# Altium PCB HCF4051.PcbDoc
Units mil, origin at the board's own origin, x right, y up, seen from the top; angles counter-clockwise.
Board outline 6000 x 4000 mil, 2 copper layers (Top Layer, Bottom Layer); 9 components, 18 nets, 54 pads, 0 vias.
Unrouted connection lines stored in the file: 6.
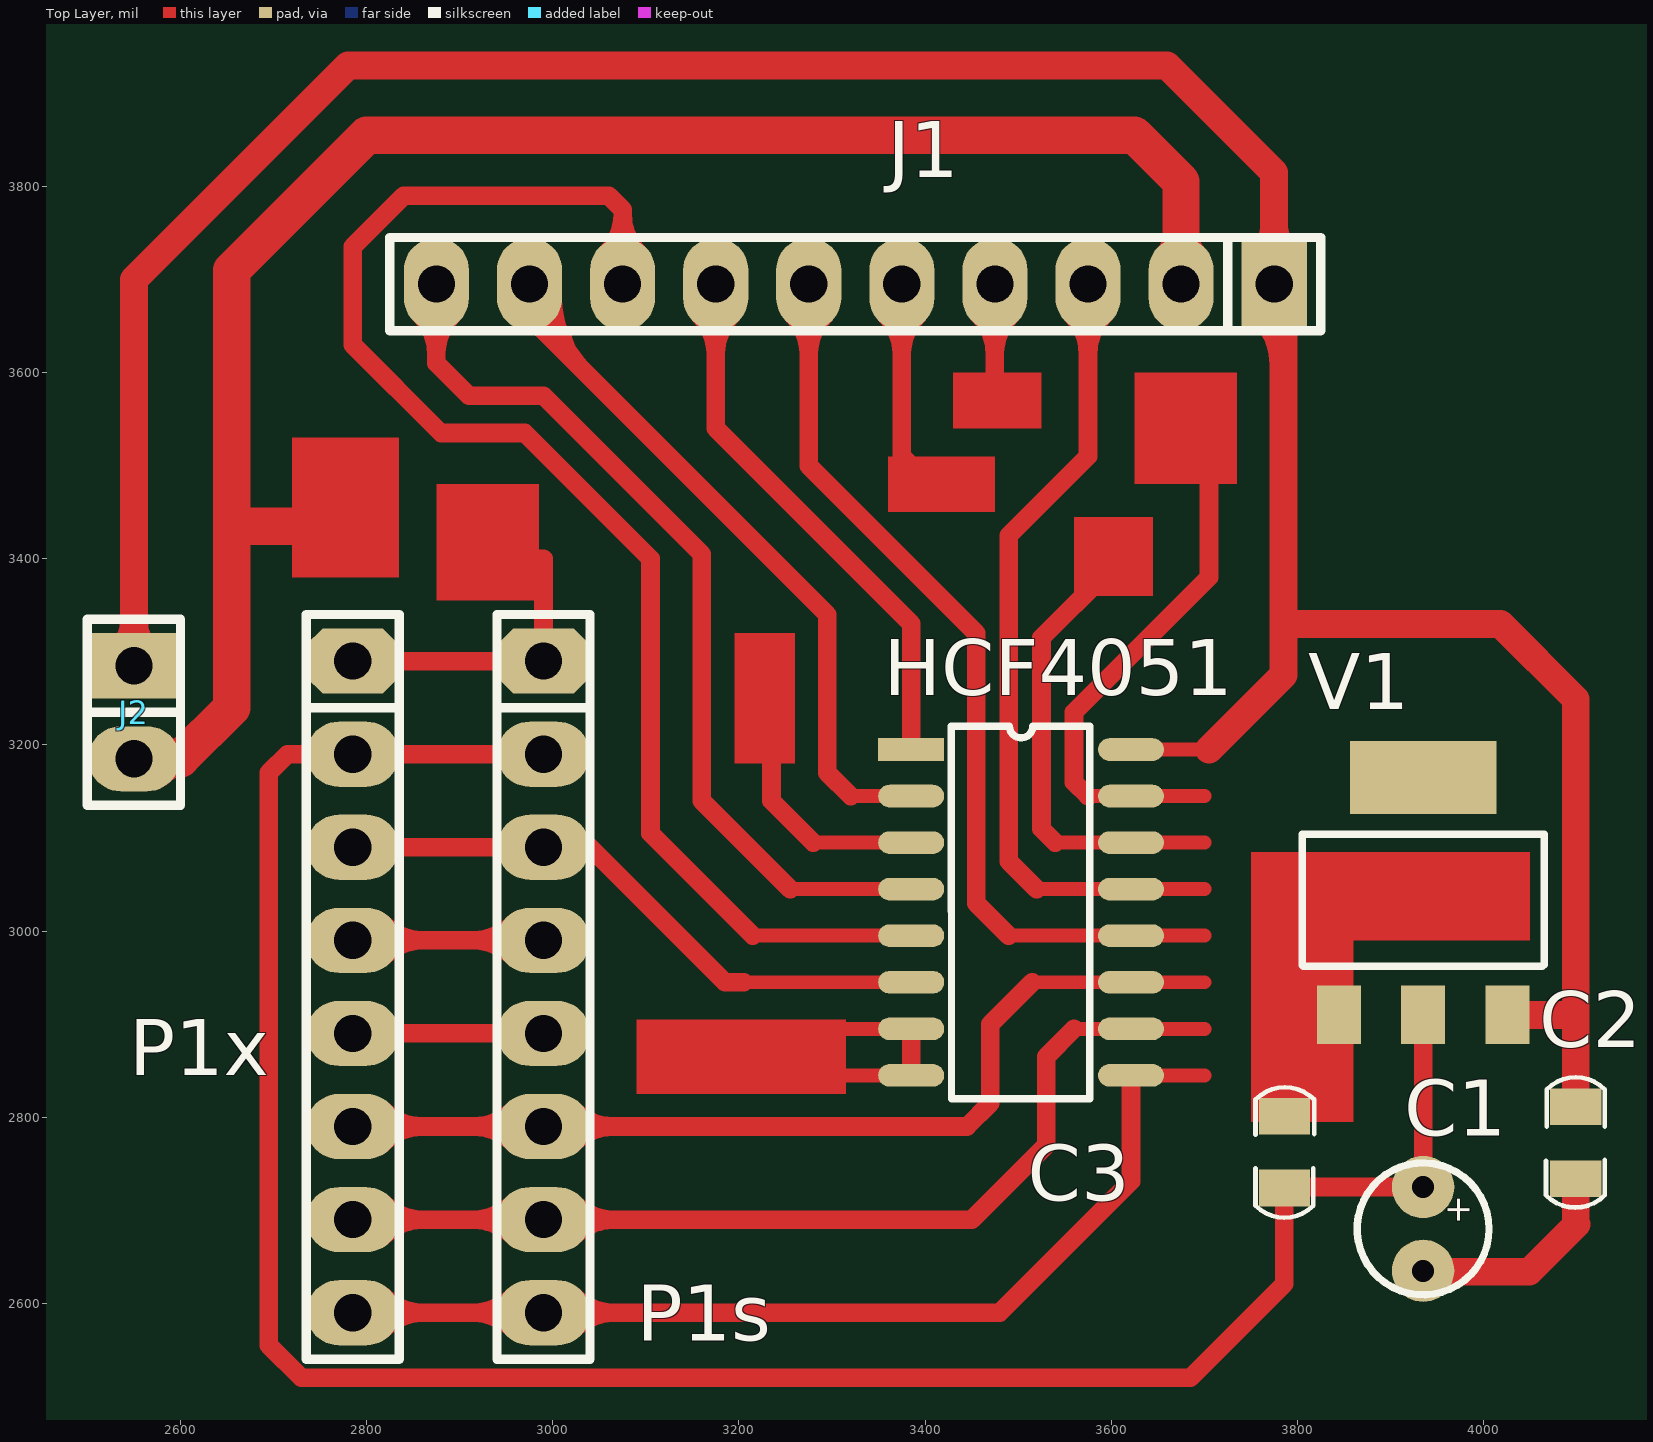
[diagram p0: Top Layer view]
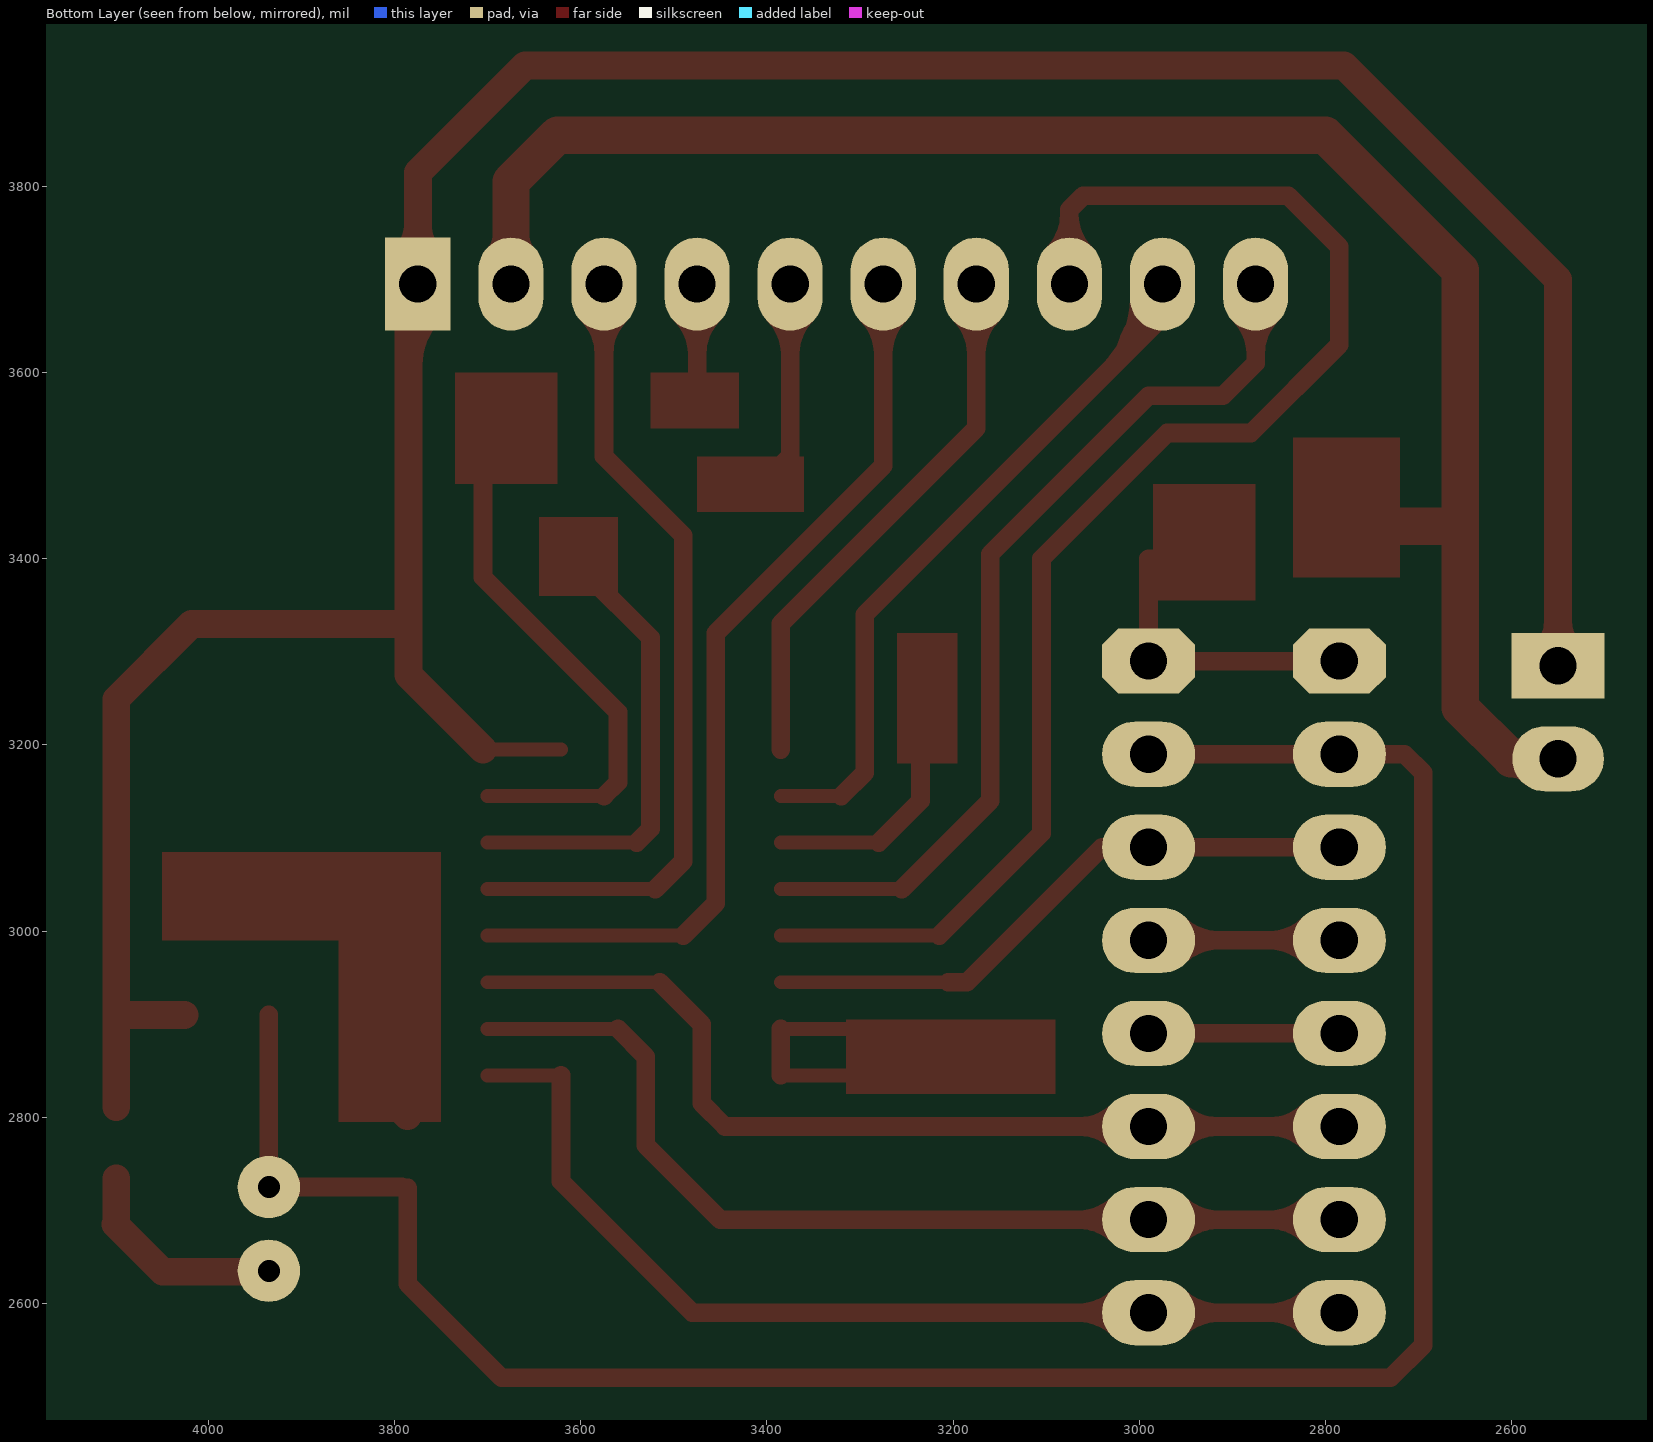
[diagram p1: Bottom Layer view, seen from below]

## Layer stack, top to bottom
Top Layer: signal copper 1.4
Dielectric: dielectric 12.6, FR-4, Dk 4.8
Bottom Layer: signal copper 1.4

## Board outline
1000,1000 7000,1000 7000,5000 1000,5000

## Design rules (kind name [scope] priority, off if disabled: settings)
Clearance [All] p1: gap=10
ComponentClearance [All] p1 off: gap=10 collisioncheckmode=3 verticalgap=10 showdistances=FALSE
PolygonConnect [All] p1: connectstyle=Relief reliefconductorwidth=10 reliefentries=4 polygonreliefangle="90 Angle" airgapwidth=10
RoutingVias [All] p1: holewidth=28 width=50 viastyle="Through Hole" minholewidth=28 minwidth=50 maxholewidth=28 maxwidth=50
SilkscreenOverComponentPads [All] p1: minsilkscreentomaskgap=10
SolderMaskExpansion [All] p1: expansion=4
Width [All] p1: maxlimit=100 minlimit=10 preferedwidth=10
26 further rules are at their usual default settings.

## Components (designator, comment, footprint, x,y, rotation, side; value= is the part's Value field where it differs from the comment)
C1 "220uF" CAO1 3935,2680 r270 top
C2 "104" C0805 4100,2735 r90 top
C3 "104" C0805 3785,2800 r270 top
HCF4051 "4051" SOP-16 3385,3195 r0 top
J1 "CON10" sip-10 3775,3695 r180 top
J2 "CON2" sip-2 2550,3285 r270 top
P1s "CON8" sip-8 2990,3290 r270 top
P1x "CON8" sip-8 2785,3290 r270 top
V1 "TLV1117" SOT-223 3935,2910 r0 top

## Footprints (in the part's own frame and the unit in brackets; to place one, negate y for a bottom-side part, rotate by r counter-clockwise, add the part's x,y. Pads: shape width x height; smd on the part's side, far side on the other; paste and mask are expansions set on the pad)
C0805 [mm]
  rect 1x1.4 smd: 1(-0.025,0.025) 2(1.933,0.025)
  silkscreen extent -0.81,-0.76 2.74,0.84
CAO1 [mm]
  round 1.7 hole 0.6: 1(-1.143,0) 2(1.143,0)
  silkscreen extent -1.8,-1.8 1.8,1.8
sip-2 [mil]
  rect 70x100 hole 40: 1(0,0)
  oval 70x98.42 hole 40: 2(100,0)
  silkscreen extent -50,-50 150,50
sip-8 [mil]
  oct 70x100 hole 40: 1(0,0)
  oval 70x100 hole 40: 2(100,0) 3(200,0) 4(300,0) 5(400,0) 6(500,0) 7(600,0) 8(700,0)
  silkscreen extent -50,-50 750,50
sip-10 [mil]
  rect 70x100 hole 40: 1(0,0)
  oval 70x100 hole 40: 2(100,0) 3(200,0) 4(300,0) 5(400,0) 6(500,0) 7(600,0) 8(700,0) 9(800,0) 10(900,0)
  silkscreen extent -50,-50 950,50
SOP-16 [mm]
  rect 1.8x0.62 smd: 1(0,0)
  oval 1.8x0.62 smd: 2(0,-1.27) 3(0,-2.54) 4(0,-3.81) 5(0,-5.08) 6(0,-6.35) 7(0,-7.62) 8(0,-8.89) 9(6,-8.89) 10(6,-7.62) 11(6,-6.35) 12(6,-5.08) 13(6,-3.81) 14(6,-2.54) 15(6,-1.27) 16(6,0)
  silkscreen extent 1.09,-9.53 4.88,0.64
SOT-223 [mm]
  rect 1.2x1.6 smd: 1(-2.3,0) 2(0,0) 3(2.3,0)
  rect 4x2 smd: 4(0,6.477)
  silkscreen extent -3.3,1.32 3.3,4.93

## Part data
C1 C2 C3: library part C
HCF4051: library part 405
J1 J2 P1s P1x: "Connec"
V1: library part TL

## Nets (pads, with @x,y where several pads share a name; then routed paths per layer and width w, separated by ;. In a path a pad name is that pad's centre, name@x,y a point inside that pad or via, vN(x,y) a via of type N, cw(c..) or ccw(c..) an arc to the next point about the centre after c; other vN are vias at no path point)
3.3V: C1.1 C3.2 P1s.2 P1x.2 V1.2 | length 2496.4
  Top Layer w20: P1s.2 P1x.2 2715,3190 2695,3170 2695,2555 2730,2520 3685,2520 3786,2621 C3.2 ; C3.2@3792.09,2725 C1.1 V1.2
ADC0: HCF4051.3 P1s.1 P1x.1 | length 593.6
  Top Layer w15: 3280,3095 HCF4051.3
  Top Layer w20: P1x.1 P1s.1 2990,3400 2955,3400 ; 3235,3215 3235,3140 3280,3095
D: HCF4051.11 P1s.6 P1x.6 | length 1882.2
  Top Layer w15: 3515,2945 HCF4051.11 3700,2945
  Top Layer w20: P1x.6 P1s.6 3445,2790 3470,2815 3470,2900 3515,2945 ; P1x.6@2817.68,2772.32 cw(c2860.36,2729.64) 2860.36,2790 ; P1x.6@2817.68,2772.32 cw(c2860.36,2729.64) 2860.36,2790 ; P1x.6@2817.68,2772.32 cw(c2860.36,2729.64) 2860.36,2790 ; P1x.6@2817.68,2807.68 ccw(c2860.36,2850.36) 2860.36,2790 ; P1x.6@2817.68,2807.68 ccw(c2860.36,2850.36) 2860.36,2790 ; P1x.6@2817.68,2807.68 ccw(c2860.36,2850.36) 2860.36,2790 ; 2914.64,2790 ccw(c2914.64,2850.36) P1s.6@2957.32,2807.68 ; 2914.64,2790 cw(c2914.64,2729.64) P1s.6@2957.32,2772.32 ; 2914.64,2790 ccw(c2914.64,2850.36) P1s.6@2957.32,2807.68 ; 2914.64,2790 cw(c2914.64,2729.64) P1s.6@2957.32,2772.32 ; 2914.64,2790 ccw(c2914.64,2850.36) P1s.6@2957.32,2807.68 ; 2914.64,2790 cw(c2914.64,2729.64) P1s.6@2957.32,2772.32 ; P1s.6@3022.68,2772.32 cw(c3065.36,2729.64) 3065.36,2790 ; P1s.6@3022.68,2772.32 cw(c3065.36,2729.64) 3065.36,2790 ; P1s.6@3022.68,2772.32 cw(c3065.36,2729.64) 3065.36,2790 ; P1s.6@3022.68,2807.68 ccw(c3065.36,2850.36) 3065.36,2790 ; P1s.6@3022.68,2807.68 ccw(c3065.36,2850.36) 3065.36,2790 ; P1s.6@3022.68,2807.68 ccw(c3065.36,2850.36) 3065.36,2790
E: HCF4051.10 P1s.7 P1x.7 | length 1908.8
  Top Layer w15: 3560,2895 HCF4051.10 3700,2895
  Top Layer w20: P1x.7 P1s.7 3450,2690 3530,2770 3530,2865 3560,2895 ; P1x.7@2817.68,2672.32 cw(c2860.36,2629.64) 2860.36,2690 ; P1x.7@2817.68,2672.32 cw(c2860.36,2629.64) 2860.36,2690 ; P1x.7@2817.68,2672.32 cw(c2860.36,2629.64) 2860.36,2690 ; P1x.7@2817.68,2707.68 ccw(c2860.36,2750.36) 2860.36,2690 ; P1x.7@2817.68,2707.68 ccw(c2860.36,2750.36) 2860.36,2690 ; P1x.7@2817.68,2707.68 ccw(c2860.36,2750.36) 2860.36,2690 ; 2914.64,2690 ccw(c2914.64,2750.36) P1s.7@2957.32,2707.68 ; 2914.64,2690 cw(c2914.64,2629.64) P1s.7@2957.32,2672.32 ; 2914.64,2690 ccw(c2914.64,2750.36) P1s.7@2957.32,2707.68 ; 2914.64,2690 cw(c2914.64,2629.64) P1s.7@2957.32,2672.32 ; 2914.64,2690 ccw(c2914.64,2750.36) P1s.7@2957.32,2707.68 ; 2914.64,2690 cw(c2914.64,2629.64) P1s.7@2957.32,2672.32 ; P1s.7@3022.68,2672.32 cw(c3065.36,2629.64) 3065.36,2690 ; P1s.7@3022.68,2672.32 cw(c3065.36,2629.64) 3065.36,2690 ; P1s.7@3022.68,2672.32 cw(c3065.36,2629.64) 3065.36,2690 ; P1s.7@3022.68,2707.68 ccw(c3065.36,2750.36) 3065.36,2690 ; P1s.7@3022.68,2707.68 ccw(c3065.36,2750.36) 3065.36,2690 ; P1s.7@3022.68,2707.68 ccw(c3065.36,2750.36) 3065.36,2690
F: HCF4051.9 P1s.8 P1x.8 | length 1940.5
  Top Layer w15: HCF4051.9 3700,2845
  Top Layer w20: P1x.8 P1s.8 3480,2590 3621.22,2731.22 HCF4051.9 ; P1x.8@2817.68,2572.32 cw(c2860.36,2529.64) 2860.36,2590 ; P1x.8@2817.68,2572.32 cw(c2860.36,2529.64) 2860.36,2590 ; P1x.8@2817.68,2572.32 cw(c2860.36,2529.64) 2860.36,2590 ; P1x.8@2817.68,2607.68 ccw(c2860.36,2650.36) 2860.36,2590 ; P1x.8@2817.68,2607.68 ccw(c2860.36,2650.36) 2860.36,2590 ; P1x.8@2817.68,2607.68 ccw(c2860.36,2650.36) 2860.36,2590 ; 2914.64,2590 ccw(c2914.64,2650.36) P1s.8@2957.32,2607.68 ; 2914.64,2590 cw(c2914.64,2529.64) P1s.8@2957.32,2572.32 ; 2914.64,2590 ccw(c2914.64,2650.36) P1s.8@2957.32,2607.68 ; 2914.64,2590 cw(c2914.64,2529.64) P1s.8@2957.32,2572.32 ; 2914.64,2590 ccw(c2914.64,2650.36) P1s.8@2957.32,2607.68 ; 2914.64,2590 cw(c2914.64,2529.64) P1s.8@2957.32,2572.32 ; P1s.8@3022.68,2572.32 cw(c3065.36,2529.64) 3065.36,2590 ; P1s.8@3022.68,2572.32 cw(c3065.36,2529.64) 3065.36,2590 ; P1s.8@3022.68,2572.32 cw(c3065.36,2529.64) 3065.36,2590 ; P1s.8@3022.68,2607.68 ccw(c3065.36,2650.36) 3065.36,2590 ; P1s.8@3022.68,2607.68 ccw(c3065.36,2650.36) 3065.36,2590 ; P1s.8@3022.68,2607.68 ccw(c3065.36,2650.36) 3065.36,2590
GND: C1.2 C2.1 C3.1 HCF4051.7 HCF4051.8 J1.2 J2.2 V1.1 | length 2671.5
  Top Layer w15: 3285,2895 HCF4051.7 ; 3290,2845 HCF4051.8
  Top Layer w20: HCF4051.8 HCF4051.7
  Top Layer w30: C3.1 3844.45,2859.45 V1.1 ; C1.2@3936,2634 4049,2634 4100,2685 4099,2686 C2.1
  Top Layer w40: J2.2 2600,3185 2655,3240 2655,3435 ; J2.2@2574.82,3174.39 cw(c2600.43,3148.79) 2600.43,3185 cw(c2600.43,3221.21) J2.2@2574.82,3195.61 ; 2790,3435 2655,3435 ; J1.2@3664.39,3720.61 ccw(c3638.79,3746.21) 3675,3746.21 ccw(c3711.21,3746.21) J1.2@3685.61,3720.61 ; J1.2 3675,3805 3625,3855 2800,3855 2655,3710 2655,3435 ; C1.2 C1.2@3936,2634
INH: HCF4051.6 P1s.3 P1x.3 | length 660.1
  Top Layer w15: 3205,2945 HCF4051.6
  Top Layer w20: P1x.3 P1s.3 3040,3090 3185,2945 3205,2945
NetP1s_5: P1s.5 P1x.5 | length 205
  Top Layer w20: P1x.5 P1s.5
PWM: P1s.4 P1x.4 | length 773.8
  Top Layer w20: P1x.4 P1s.4 ; P1x.4@2817.68,2972.32 cw(c2860.36,2929.64) 2860.36,2990 ; P1x.4@2817.68,2972.32 cw(c2860.36,2929.64) 2860.36,2990 ; P1x.4@2817.68,2972.32 cw(c2860.36,2929.64) 2860.36,2990 ; P1x.4@2817.68,3007.68 ccw(c2860.36,3050.36) 2860.36,2990 ; P1x.4@2817.68,3007.68 ccw(c2860.36,3050.36) 2860.36,2990 ; P1x.4@2817.68,3007.68 ccw(c2860.36,3050.36) 2860.36,2990 ; 2914.64,2990 ccw(c2914.64,3050.36) P1s.4@2957.32,3007.68 ; 2914.64,2990 cw(c2914.64,2929.64) P1s.4@2957.32,2972.32 ; 2914.64,2990 ccw(c2914.64,3050.36) P1s.4@2957.32,3007.68 ; 2914.64,2990 cw(c2914.64,2929.64) P1s.4@2957.32,2972.32 ; 2914.64,2990 ccw(c2914.64,3050.36) P1s.4@2957.32,3007.68 ; 2914.64,2990 cw(c2914.64,2929.64) P1s.4@2957.32,2972.32
VCC: C2.2 HCF4051.16 J1.1 J2.1 V1.3 | length 3599.3
  Top Layer w15: HCF4051.16 3705,3195
  Top Layer w30: J2.1@2535.86,3299.14 ccw(c2501.72,3333.28) 2550,3333.28 ccw(c2598.28,3333.28) J2.1@2564.14,3299.14 ; J2.1 2550,3700 2780,3930 3660,3930 3775,3815 J1.1 3785,3685 3785,3330 ; 3705,3195 3785,3275 3785,3330 ; J1.1@3760.86,3665.86 cw(c3702.57,3607.57) 3785,3607.57 ; J1.1@3760.86,3724.14 ccw(c3726.72,3758.28) 3775,3758.28 ccw(c3823.28,3758.28) J1.1@3789.14,3724.14 ; V1.3 4099,2910 ; C2.2 4099,2910 ; 3785,3330 4018,3330 4099,3249 4099,2910
X1: HCF4051.13 J1.3 | length 1162.1
  Top Layer w15: 3520,3045 HCF4051.13 3700,3045
  Top Layer w20: 3520,3045 3490,3075 3490,3425 3575,3510 J1.3 ; J1.3@3557.32,3662.32 cw(c3514.64,3619.64) 3575,3619.64 ; J1.3@3557.32,3662.32 cw(c3514.64,3619.64) 3575,3619.64 ; J1.3@3557.32,3662.32 cw(c3514.64,3619.64) 3575,3619.64 ; 3575,3619.64 cw(c3635.36,3619.64) J1.3@3592.68,3662.32 ; 3575,3619.64 cw(c3635.36,3619.64) J1.3@3592.68,3662.32 ; 3575,3619.64 cw(c3635.36,3619.64) J1.3@3592.68,3662.32
X2: HCF4051.14 J1.4 | length 924.6
  Top Layer w15: 3540,3095 HCF4051.14 3700,3095
  Top Layer w20: 3475,3565 J1.4 ; 3540,3095 3525,3110 3525,3315 3595,3385 3595,3410 ; J1.4@3457.32,3662.32 cw(c3414.64,3619.64) 3475,3619.64 ; J1.4@3457.32,3662.32 cw(c3414.64,3619.64) 3475,3619.64 ; J1.4@3457.32,3662.32 cw(c3414.64,3619.64) 3475,3619.64 ; 3475,3619.64 cw(c3535.36,3619.64) J1.4@3492.68,3662.32 ; 3475,3619.64 cw(c3535.36,3619.64) J1.4@3492.68,3662.32 ; 3475,3619.64 cw(c3535.36,3619.64) J1.4@3492.68,3662.32
X3: HCF4051.15 J1.5 | length 1146.8
  Top Layer w15: 3575,3145 HCF4051.15 3700,3145
  Top Layer w20: J1.5 3375,3510 3415,3470 ; 3575,3145 3560,3160 3560,3235 3705,3380 3705,3525 3670,3560 ; J1.5@3357.32,3662.32 cw(c3314.64,3619.64) 3375,3619.64 ; J1.5@3357.32,3662.32 cw(c3314.64,3619.64) 3375,3619.64 ; J1.5@3357.32,3662.32 cw(c3314.64,3619.64) 3375,3619.64 ; 3375,3619.64 cw(c3435.36,3619.64) J1.5@3392.68,3662.32 ; 3375,3619.64 cw(c3435.36,3619.64) J1.5@3392.68,3662.32 ; 3375,3619.64 cw(c3435.36,3619.64) J1.5@3392.68,3662.32
X4: HCF4051.12 J1.6 | length 1283.5
  Top Layer w15: 3490,2995 HCF4051.12 3700,2995
  Top Layer w20: J1.6 3275,3500 3455,3320 3455,3030 3490,2995 ; J1.6@3257.32,3662.32 cw(c3214.64,3619.64) 3275,3619.64 ; J1.6@3257.32,3662.32 cw(c3214.64,3619.64) 3275,3619.64 ; J1.6@3257.32,3662.32 cw(c3214.64,3619.64) 3275,3619.64 ; 3275,3619.64 cw(c3335.36,3619.64) J1.6@3292.68,3662.32 ; 3275,3619.64 cw(c3335.36,3619.64) J1.6@3292.68,3662.32 ; 3275,3619.64 cw(c3335.36,3619.64) J1.6@3292.68,3662.32
X5: HCF4051.1 J1.7 | length 871.4
  Top Layer w20: J1.7 3175,3540 3385,3330 HCF4051.1 ; J1.7@3157.32,3662.32 cw(c3114.64,3619.64) 3175,3619.64 ; J1.7@3157.32,3662.32 cw(c3114.64,3619.64) 3175,3619.64 ; J1.7@3157.32,3662.32 cw(c3114.64,3619.64) 3175,3619.64 ; 3175,3619.64 cw(c3235.36,3619.64) J1.7@3192.68,3662.32 ; 3175,3619.64 cw(c3235.36,3619.64) J1.7@3192.68,3662.32 ; 3175,3619.64 cw(c3235.36,3619.64) J1.7@3192.68,3662.32
X6: HCF4051.5 J1.8 | length 1824.2
  Top Layer w15: 3215,2995 HCF4051.5
  Top Layer w20: J1.8 3075,3775 3060,3790 2840,3790 2785,3735 2785,3630 2880,3535 2970,3535 3105,3400 3105,3105 3215,2995 ; J1.8@3057.32,3727.68 ccw(c3014.64,3770.36) 3075,3770.36 ; J1.8@3057.32,3727.68 ccw(c3014.64,3770.36) 3075,3770.36 ; J1.8@3057.32,3727.68 ccw(c3014.64,3770.36) 3075,3770.36 ; 3075,3770.36 ccw(c3135.36,3770.36) J1.8@3092.68,3727.68 ; 3075,3770.36 ccw(c3135.36,3770.36) J1.8@3092.68,3727.68 ; 3075,3770.36 ccw(c3135.36,3770.36) J1.8@3092.68,3727.68
X7: HCF4051.2 J1.9 | length 1403.2
  Top Layer w15: 3320,3145 HCF4051.2
  Top Layer w20: J1.9 2975,3660 3295,3340 3295,3170 3320,3145 ; J1.9@2980.39,3655.59 cw(c2986.27,3628.89) 3003.72,3649.94 cw(c3015.51,3664.18) J1.9@2998.29,3670.91 ; J1.9@2972.92,3675.46 cw(c2941.45,3606.83) 3014.37,3626.37 ; J1.9@2972.92,3675.46 cw(c2941.45,3606.83) 3014.37,3626.37 ; J1.9@2972.92,3675.46 cw(c2941.45,3606.83) 3014.37,3626.37 ; J1.9@2980,3680 ccw(c3040.36,3680) 2997.68,3637.32 ; J1.9@2980,3680 ccw(c3040.36,3680) 2997.68,3637.32 ; J1.9@2980,3680 ccw(c3040.36,3680) 2997.68,3637.32 ; J1.9@3000,3680 ccw(c3108.64,3680) 3031.82,3603.18 ; J1.9@3000,3680 ccw(c3108.64,3680) 3031.82,3603.18 ; J1.9@3000,3680 ccw(c3108.64,3680) 3031.82,3603.18
X8: HCF4051.4 J1.10 | length 1268.7
  Top Layer w15: 3255,3045 HCF4051.4
  Top Layer w20: J1.10 2875,3610 2910,3575 2990,3575 3160,3405 3160,3140 3255,3045 ; J1.10@2857.32,3662.32 cw(c2814.64,3619.64) 2875,3619.64 ; J1.10@2857.32,3662.32 cw(c2814.64,3619.64) 2875,3619.64 ; J1.10@2857.32,3662.32 cw(c2814.64,3619.64) 2875,3619.64 ; 2875,3619.64 cw(c2935.36,3619.64) J1.10@2892.68,3662.32 ; 2875,3619.64 cw(c2935.36,3619.64) J1.10@2892.68,3662.32 ; 2875,3619.64 cw(c2935.36,3619.64) J1.10@2892.68,3662.32
pads on no net: V1.4

## Other copper
Top Layer:
  rectangle net GND: 3820,2990 4050,3085
  rectangle net GND: 3750,2795 3860,3085
  rectangle net ADC0: 2875,3355 2985,3480
  rectangle net GND: 3090,2825 3315,2905
  rectangle net X3: 3625,3480 3735,3600
  rectangle net X2: 3560,3360 3645,3445
  rectangle net X2: 3430,3540 3525,3600
  rectangle net X3: 3360,3450 3475,3510
  rectangle net ADC0: 3195,3180 3260,3320
  rectangle net GND: 2720,3380 2835,3530

## Text inside footprints (layer, text, board x,y; h text height)
C1: Top Overlay "+" at 3961.57,2716.42 h27.56 r270